# EAGLE board answer (EAGLE 7.7.0)
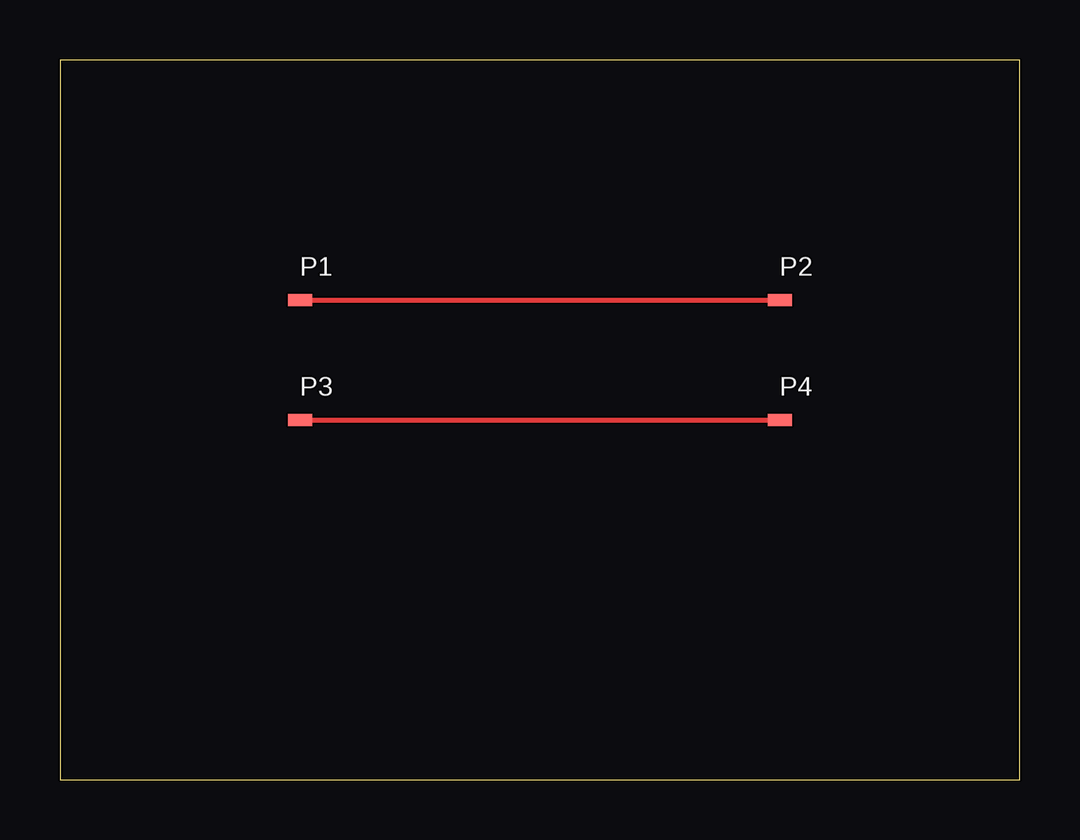
[diagram p0: board, top side]

Size 40 x 30 mm. Coordinates in mm from the lower left corner, seen from the top.
Outline: 0,0 40,0 40,30 0,30 0,0
Copper layers used: Top

## Footprints (pad centres in the part's own frame; a part is rotated, then mirrored left to right if it is on the bottom)
PAD1 = smd 1 x 0.5: 1 0,0

## Placement (x,y rotation side)
P1  USB_DP_A  [PAD1]  10,20 0 top
P2  USB_DP_B  [PAD1]  30,20 0 top
P3  USB_DM_A  [PAD1]  10,15 0 top
P4  USB_DM_B  [PAD1]  30,15 0 top

## Library data of the parts
P1-P4 = stub

## Nets
USB_DM: P3.1 P4.1
USB_DP: P1.1 P2.1

## Tracks (layer width: path | path; a pad name or v marks a point on that pad's centre or on a via)
USB_DM
  Top 0.2: P3.1 P4.1
USB_DP
  Top 0.2: P1.1 P2.1